# Altium PCB PCB.pcbdoc
Units mm, origin at the board's own origin, x right, y up, seen from the top; angles counter-clockwise.
Board outline 118.36 x 80.66 mm, 2 copper layers (Top Layer, Bottom Layer); 16 components, 19 nets, 49 pads, 0 vias.
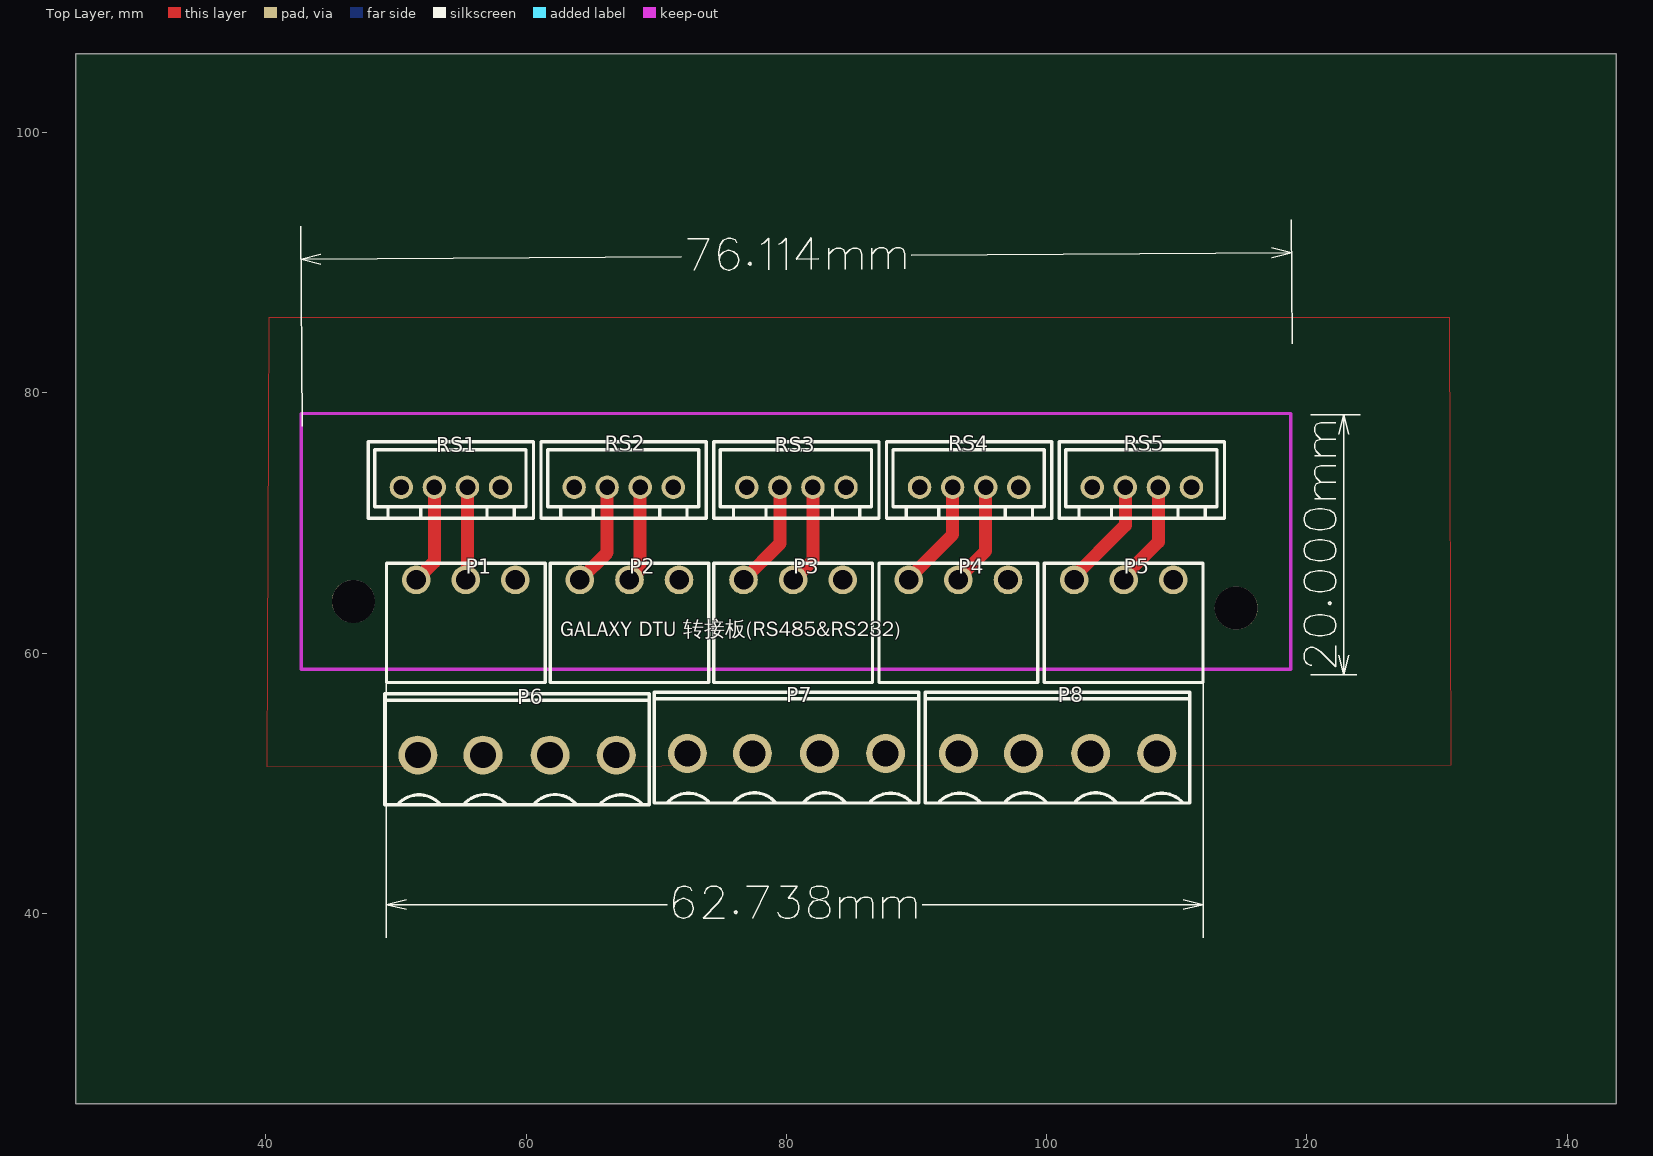
[diagram p0: Top Layer view]
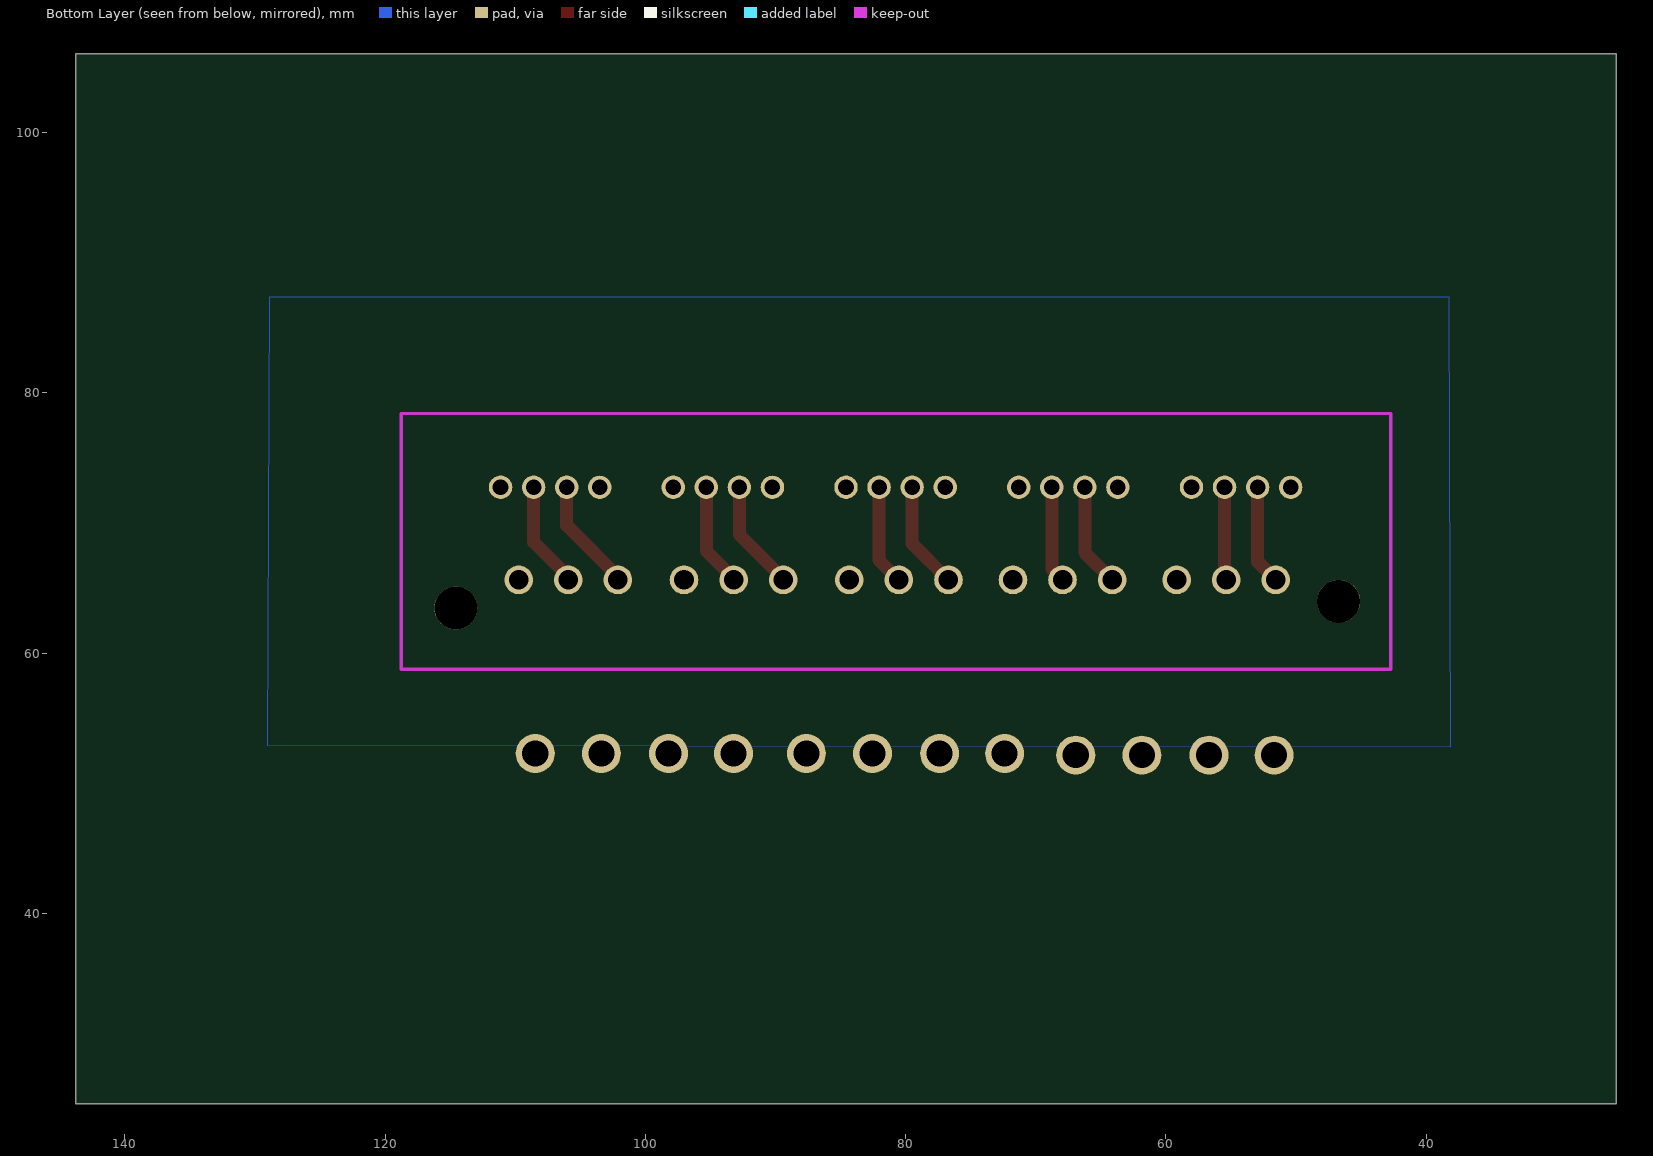
[diagram p1: Bottom Layer view, seen from below]

## Layer stack, top to bottom
Top Layer: signal copper (thickness not stored)
Dielectric: dielectric 0.32, FR-4, Dk 4.8
Bottom Layer: signal copper (thickness not stored)

## Board outline
143.764,25.4 25.4,25.4 25.4,106.058 143.764,106.058

## Components (designator, comment, footprint, x,y, rotation, side; value= is the part's Value field where it differs from the comment)
P1 "WJ15EDGRC-3.81-3P" WJ15EDGRC-3.81-3P 55.372,65.628 r0 top
P2 "WJ15EDGRC-3.81-3P" WJ15EDGRC-3.81-3P 67.945,65.628 r0 top
P3 "WJ15EDGRC-3.81-3P" WJ15EDGRC-3.81-3P 80.518,65.628 r0 top
P4 "WJ15EDGRC-3.81-3P" WJ15EDGRC-3.81-3P 93.218,65.628 r0 top
P5 "WJ15EDGRC-3.81-3P" WJ15EDGRC-3.81-3P 105.918,65.628 r0 top
P6 "WJ2EDGV-5.08-4P" WJ2EDGV-5.08-4P 59.309,52.166 r0 top
P7 "WJ2EDGV-5.08-4P" WJ2EDGV-5.08-4P 80.01,52.293 r0 top
P8 "WJ2EDGV-5.08-4P" WJ2EDGV-5.08-4P 100.838,52.293 r0 top
RS1 "A2501WV-04P2" A2501WV-4P 54.229,72.74 r0 top
RS2 "A2501WV-04P2" A2501WV-4P 67.5,72.74 r0 top
RS3 "A2501WV-04P2" A2501WV-4P 80.772,72.74 r0 top
RS4 "A2501WV-04P2" A2501WV-4P 94.043,72.74 r0 top
RS5 "A2501WV-04P2" A2501WV-4P 107.315,72.74 r0 top
? "" ? 121.932,68.328 r0 top
? "" ? 80.645,50.239 r0 top
? "" ? 80.784,85.373 r0 top

## Footprints (in the part's own frame and the unit in brackets; to place one, negate y for a bottom-side part, rotate by r counter-clockwise, add the part's x,y. Pads: shape width x height; smd on the part's side, far side on the other; paste and mask are expansions set on the pad)
A2501WV-4P [mm]
  round 1.8 hole 1.2: 1(3.809,0.001) 2(1.269,0.001) 3(-1.271,0.001) 4(-3.809,-0.001)
  silkscreen extent -6.35,-2.38 6.35,3.5
WJ2EDGV-5.08-4P [mm]
  round 3 hole 2: 1(-7.62,0) 2(-2.621,0) 3(2.54,0) 4(7.62,0)
  silkscreen extent -10.16,-3.81 10.16,4.71
WJ15EDGRC-3.81-3P [mm]
  round 2.2 hole 1.5: 1(-3.81,0) 2(0,0) 3(3.81,0)
  silkscreen extent -6.1,-7.88 6.1,1.27
? [mm]
  silkscreen extent -2.15,-10 2.15,10

## Free pads (board coordinates)
  round 3.302 hole 3.302 unplated: ""(46.736,63.977) ""(114.554,63.469)

## Nets (pads, with @x,y where several pads share a name; then routed paths per layer and width w, separated by ;. In a path a pad name is that pad's centre, name@x,y a point inside that pad or via, vN(x,y) a via of type N, cw(c..) or ccw(c..) an arc to the next point about the centre after c; other vN are vias at no path point)
+5V: RS1.1 RS2.1 RS3.1 RS4.1 RS5.1
GND: P1.3 P2.3 P3.3 P4.3 P5.3 RS1.4 RS2.4 RS3.4 RS4.4 RS5.4
P2_1: P2.1 RS2.3 | length 8
  Top Layer w1: P2.1 66.229,67.723 RS2.3
P2_2: P2.2 RS2.2 | length 7.5
  Top Layer w1: P2.2 68.769,66.453 RS2.2
P3_1: P3.1 RS3.3 | length 8.3
  Top Layer w1: P3.1 79.501,68.421 RS3.3
P3_2: P3.2 RS3.2 | length 7.7
  Top Layer w1: P3.2 82.041,67.151 RS3.2
P4_1: P4.1 RS4.3 | length 8.6
  Top Layer w1: P4.1@89.281,65.628 92.772,69.12 RS4.3
P4_2: P4.2 RS4.2 | length 8
  Top Layer w1: P4.2@93.091,65.628 95.312,67.85 RS4.2
P5_1: P5.1 RS5.3 | length 8.8
  Top Layer w1: P5.1@101.854,65.628 106.044,69.818 RS5.3
P5_2: P5.2 RS5.2 | length 8.3
  Top Layer w1: P5.2@105.664,65.628 108.584,68.548 RS5.2
RS1_2: P1.2 RS1.2 | length 7.2
  Top Layer w1: P1.2 55.498,65.754 RS1.2
RS1_3: P1.1 RS1.3 | length 7.7
  Top Layer w1: P1.1 52.958,67.024 RS1.3
S$18: 
S$20: 
S$24: 
S$26: 
S$28: 
S$30: 
S$5479: 
pads on no net: P6.1 P6.2 P6.3 P6.4 P7.1 P7.2 P7.3 P7.4 P8.1 P8.2 P8.3 P8.4

## Polygon pours and split planes (outlines as drawn)
GND on Bottom Layer (solid): 38.227,87.345 128.905,87.345 129.032,52.928 38.1,52.801 38.227,87.345
GND on Top Layer (solid): 40.259,85.821 130.937,85.821 131.064,51.404 40.132,51.277 40.259,85.821

## Silkscreen, mask and mechanical layers (free items; w line width, h text height)
Top Overlay:
  text "GALAXY DTU 转接板(RS485&RS232)" at 62.631,60.863 h2.03